# Altium PCB SUPI_MediumR2.PcbDoc
Units mil, origin at the board's own origin, x right, y up, seen from the top; angles counter-clockwise.
Board outline 2415 x 840 mil, 2 copper layers (Top Layer, Bottom Layer), stack 61.8 mil thick; 54 components, 26 nets, 179 pads, 34 vias.
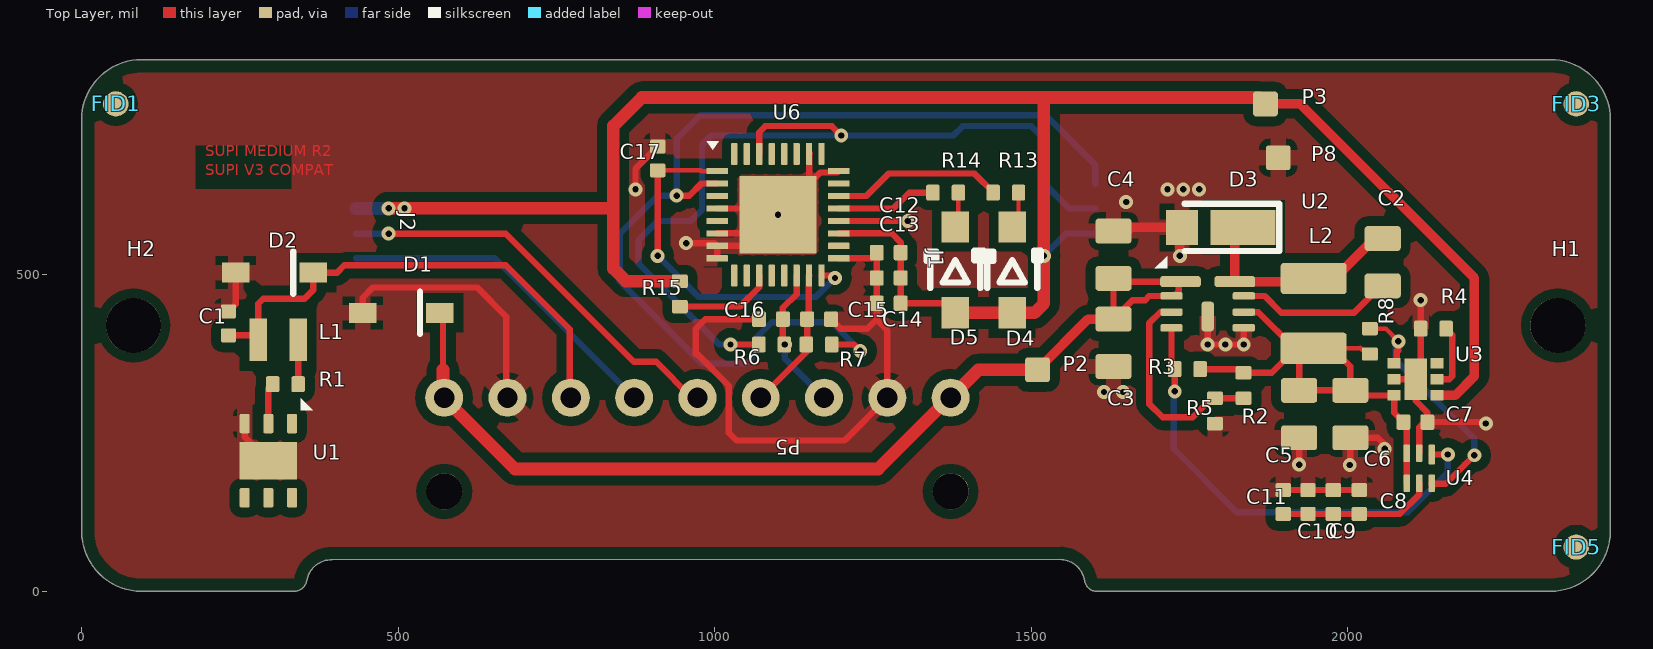
[diagram p0: Top Layer view]
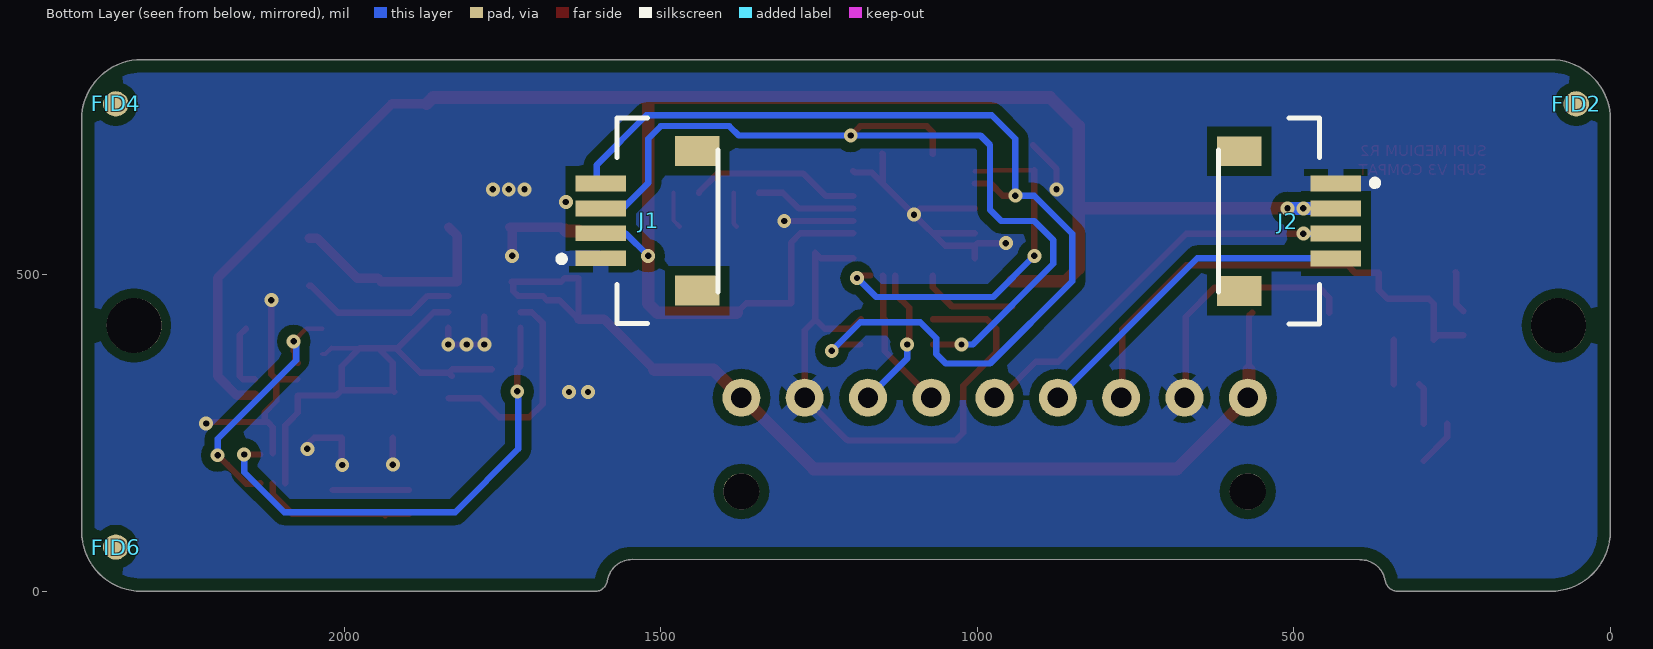
[diagram p1: Bottom Layer view, seen from below]

## Layer stack, top to bottom
Top Solder: solder mask 0.4, Solder Resist, Dk 3.5
Top Layer: signal copper 1.4
Dielectric1: dielectric 59, 370HR FR-4, Dk 4.8
Bottom Layer: signal copper 1.4
Bottom Solder: solder mask 0.4, Solder Resist, Dk 3.5

## Board outline
94.81,0 335.84,0 ccw(c335.84,20) 355.56,16.67 cw(c395,10) 360.36,30 cw(c395,10) 395,50 1545,50.36 cw(c1545,10.36) 1579.64,30.36 1579.64,30 cw(c1545,10) 1584.44,16.67 ccw(c1604.16,20) 1603.98,0 2320,0 ccw(c2320,95) 2415,95 2415,745 ccw(c2320,745) 2320,840 95,840 ccw(c95,745) 0,745 0,95 ccw(c95,95)

## Design rules (kind name [scope] priority, off if disabled: settings)
BoardOutlineClearance [All] p1: gap=20 ignorepadtopadclearanceinfootprint=FALSE
Clearance "Clearence 0.635_PadClass" [InPadClass('Pad Class Clearance 0.635')] p1: gap=25 ignorepadtopadclearanceinfootprint=FALSE
Clearance "Clearence 0.381_Polygon" [InNamedPolygon('F.Cu-') OR InNamedPolygon('B.Cu-')] p2: gap=15 ignorepadtopadclearanceinfootprint=FALSE
Clearance "Clearence 0.254_PadClass" [InPadClass('Pad Class Clearance 0.254')] p3: gap=10 ignorepadtopadclearanceinfootprint=FALSE
MinimumSolderMaskSliver [All] p1: minsoldermaskwidth=4
PolygonConnect Polygon_B.Cu-_ConnectDirect [IsNamedPolygon('B.Cu-') vs IsVia] p1: connectstyle=Direct reliefconductorwidth=10 reliefentries=4 polygonreliefangle="90 Angle" airgapwidth=10
PolygonConnect Polygon_B.Cu-_ConnectRelief45 [IsNamedPolygon('B.Cu-') vs (IsThruPin or IsSMTPin) and (PadShape_AllLayers = 'Round')] p2: connectstyle=Relief reliefconductorwidth=25 reliefentries=4 polygonreliefangle="45 Angle" airgapwidth=10
PolygonConnect Polygon_B.Cu-_ConnectRelief90 [IsNamedPolygon('B.Cu-') vs (IsThruPin or IsSMTPin) and (PadShape_AllLayers <> 'Round')] p3: connectstyle=Relief reliefconductorwidth=25 reliefentries=4 polygonreliefangle="90 Angle" airgapwidth=10
PolygonConnect Polygon_F.Cu-_ConnectDirect [IsNamedPolygon('F.Cu-') vs IsVia] p4: connectstyle=Direct reliefconductorwidth=10 reliefentries=4 polygonreliefangle="90 Angle" airgapwidth=10
PolygonConnect Polygon_F.Cu-_ConnectRelief45 [IsNamedPolygon('F.Cu-') vs (IsThruPin or IsSMTPin) and (PadShape_AllLayers = 'Round')] p5: connectstyle=Relief reliefconductorwidth=25 reliefentries=4 polygonreliefangle="45 Angle" airgapwidth=10
PolygonConnect Polygon_F.Cu-_ConnectRelief90 [IsNamedPolygon('F.Cu-') vs (IsThruPin or IsSMTPin) and (PadShape_AllLayers <> 'Round')] p6: connectstyle=Relief reliefconductorwidth=25 reliefentries=4 polygonreliefangle="90 Angle" airgapwidth=10
RoutingVias [All] p1: holewidth=28 width=50 viastyle="Through Hole" minholewidth=28 minwidth=50 maxholewidth=28 maxwidth=50
SilkToSilkClearance [All] p1: silktosilkclearance=4
SilkToSolderMaskClearance [IsPad] p1: minsilkscreentomaskgap=4 clearancetoexposedcopper=TRUE
SolderMaskExpansion [All] p1: expansion=4 istentingtop=FALSE
SupplyNets "Schematic Supply Nets" [InNet('GND')] p1: voltage=0.000
Width [All] p1: maxlimit=393.7 minlimit=7 preferedwidth=10 minimp=50.000000 maximp=50.000000 favimp=50.000000
27 further rules are at their usual default settings.

## Classes and differential pairs
component class "USB Interface": C12 C13 C14 C15 C16 C17 D4 D5 R13 R14 R15 U6
component class SUPI_MediumR2: D1 FID1 FID2 FID3 FID4 FID5 FID6 H1 H2 J1 J2 P2 P3 P5 P8 R6 R7
component class "Power Supplies": C2 C3 C4 C5 C6 C7 C8 C9 C10 C11 D3 L2 R2 R3 R4 R5 R8 U2 U3 U4
component class "Payload Detect": C1 D2 L1 R1 U1
pad class "Pad Class Clearance 0.635": P5-Un1 P5-Un2
pad class "Pad Class Clearance 0.254": FID1-Un1 FID2-Un1 FID3-Un1 FID4-Un1 FID5-Un1 FID6-Un1

## Components (designator, comment, footprint, x,y, rotation, side; value= is the part's Value field where it differs from the comment)
C1 "4700pF 50V" C_0402_1005Metric 232.05,423.37 r90 top
C2 "330n" C_0805_2012Metric 2055.29,520 r90 top
C3 "10u" C_0805_2012Metric 1630,392.6 r270 top
C4 "10u" C_0805_2012Metric 1630,531.8 r90 top
C5 "22u" C_0805_2012Metric 1923.29,280.1 r270 top
C6 "22u" C_0805_2012Metric 2004.29,280.1 r270 top
C7 "100n" C_0402_1005Metric 2106.87,267.45 r0 top
C8 "100n" C_0402_1005Metric 2018.29,141.2 r90 top
C9 "100n" C_0402_1005Metric 1977.29,141 r90 top
C10 "100n" C_0402_1005Metric 1937.29,141.1 r90 top
C11 "100n" C_0402_1005Metric 1898.29,141.2 r90 top
C12 "100n" C_0402_1005Metric 1275,535 r180 top
C13 "100n" C_0402_1005Metric 1275,495 r180 top
C14 "4u7" C_0402_1005Metric 1275,455 r180 top
C15 "47p" C_0402_1005Metric 1165,430 r0 top
C16 "47p" C_0402_1005Metric 1088.9,430 r180 top
C17 "100n" C_0402_1005Metric 910,683.9 r90 top
D1 "26VWM" SOD-123FL 505,440 r180 top
D2 "3.3VWM" SOD-123FL 304.79,503.5 r180 top
D3 "100v" SOD-123HE 1799.35,575 r180 top
D4 "RED LED" D_LED_0805_Kingbright 1470,507.91 r270 top
D5 "RED LED" D_LED_0805_Kingbright 1380,507.91 r270 top
FID1 "Fiducial" Fiducial_Cu0.040_Mask0.060#1 54,770 r0 top
FID2 "Fiducial" Fiducial_Cu0.040_Mask0.060#2 54,770 r180 top
FID3 "Fiducial" Fiducial_Cu0.040_Mask0.060#1 2361,770 r0 top
FID4 "Fiducial" Fiducial_Cu0.040_Mask0.060#2 2361,770 r180 top
FID5 "Fiducial" Fiducial_Cu0.040_Mask0.060#1 2361,70 r0 top
FID6 "Fiducial" Fiducial_Cu0.040_Mask0.060#2 2361,70 r180 top
H1 "MountingHole" MountingHole_2.2mm_M2_DIN965 2332,420 r0 top
H2 "MountingHole" MountingHole_2.2mm_M2_DIN965 82,420 r0 top
J1 "SM04B-SRSS-TB" SM04B-SRSS-TB 1518.72,585.32 r90 bottom
J2 "SM04B-SRSS-TB" SM04B-SRSS-TB 510,585 r270 bottom
L1 "27 OHM @2MHZ" IND_BOURNS_0806 310.55,397.26 r0 top
L2 "2u2" L_1210_3225Metric 1946.29,439.12 r270 top
P2 "*" TP_SMD_1MM 1510,350 r0 top
P3 "*" TP_SMD_1MM 1870,770 r270 top
P5 "829-22-009-20-001101" 829-22-009-20-001101 972.83,305.91 r0 top
P8 "*" TP_SMD_1MM 1890.29,685 r0 top
R1 "100 1% 0.1W" R_0402_1005Metric 321.97,327.26 r0 top
R2 "52k3" R_0402_1005Metric 1835.29,325.08 r270 top
R3 "113k" R_0402_1005Metric 1746.86,350.98 r0 top
R4 "10k" R_0402_1005Metric 2135.29,415 r0 top
R5 "10k" R_0402_1005Metric 1790.29,285.08 r90 top
R6 "0R" R_0402_1005Metric 1090,390 r180 top
R7 "0R" R_0402_1005Metric 1164.92,390 r0 top
R8 "10k" R_0402_1005Metric 2035,395 r270 top
R13 "499R" R_0402_1005Metric 1459.92,629.84 r180 top
R14 "499R" R_0402_1005Metric 1364.92,629.84 r180 top
R15 "10k" R_0402_1005Metric 945,469.92 r90 top
U1 "DS2431Q+" Maxim_TDFN-6-1EP_3x3mm_P0.95mm_EP1.5x2.3mm 295,206.44 r270 top
U2 "MCP16361" Microchip_8-VDFN_3x3x0p9 1778.78,453.88 r0 top
U3 "NCP380" WDFN-6_MicroFET_2x2 2107.35,335.1 r180 top
U4 "TPS3890" WSON-6_0.8mm_TI_DSE0006A 2112.98,194.45 r270 top
U6 "FT232RNQ" QFN-32-1EP_5x5mm_P0.5mm_EP3.1x3.1mm 1100,595 r0 top

## Footprints (in the part's own frame and the unit in brackets; to place one, negate y for a bottom-side part, rotate by r counter-clockwise, add the part's x,y. Pads: shape width x height; smd on the part's side, far side on the other; paste and mask are expansions set on the pad)
829-22-009-20-001101 [mil]
  round 60 hole 32: 1(-400,0) 2(-300,0) 3(-200,0) 4(-100,0) 5(0,0) 6(100,0) 7(200,0) 8(300,0) 9(400,0)
  round 57 hole 57 unplated: 10(-400,-148) 11(400,-148)
  body extent -450,-414 450,14, height 100
C_0402_1005Metric [mm]
  rrect25% 0.56x0.62 smd: 1(-0.48,0) 2(0.48,0)
C_0805_2012Metric [mm]
  rrect25% 1x1.45 smd: 1(-0.95,0) 2(0.95,0)
D_LED_0805_Kingbright [mm]
  rect 1.25x1.1 smd: 1(-1.725,0) 2(1.725,0)
  silkscreen extent -0.76,-1.15 0.73,1.14
Fiducial_Cu0.040_Mask0.060#1 [mil]
  round 40 smd paste-40 mask-40: Un1(0,0)
Fiducial_Cu0.040_Mask0.060#2 [mil]
  round 40 smd far side paste-40 mask-40: Un1(0,0)
IND_BOURNS_0806 [mil]
  rect 28x67 smd: 1(-31.5,0) 2(31.5,0)
L_1210_3225Metric [mm]
  rrect20% 1.25x2.65 smd: 1(-1.4,0) 2(1.4,0)
Maxim_TDFN-6-1EP_3x3mm_P0.95mm_EP1.5x2.3mm [mm]
  rrect25% 0.775x0.4 smd: 1(-1.488,0.95) 2(-1.488,0) 3(-1.488,-0.95) 4(1.488,-0.95) 5(1.488,0) 6(1.488,0.95)
  rect 1.5x2.3 smd paste-2539.97: 7(0,0)
  rrect25% 0.6x0.93 on Top Paste paste-0.93 mask-0.93: Un1(-0.375,0.575) Un2(-0.375,-0.575) Un3(0.375,0.575) Un4(0.375,-0.575)
  silkscreen extent -2.51,1.31 -2.03,1.79
Microchip_8-VDFN_3x3x0p9 [mm]
  rrect50% 1.63x0.45 smd mask+0.025: 1(-1.09,0.9) 8(1.09,0.9)
  rrect50% 0.9x0.3 smd mask+0.025: 2(-1.45,0.325) 7(1.45,0.325)
  rrect50% 0.9x0.3 smd mask+0.051: 3(-1.45,-0.325) 4(-1.45,-0.955) 5(1.45,-0.955) 6(1.45,-0.325)
  rrect50% 0.5x1.2 smd mask+0.051: 9(0,-0.5)
  silkscreen extent -2.12,1.43 -1.62,1.93
MountingHole_2.2mm_M2_DIN965 [mm]
  round 2.2 hole 2.2 paste-2539.97 mask-2.2: Un1(0,0)
QFN-32-1EP_5x5mm_P0.5mm_EP3.1x3.1mm [mm]
  rrect25% 0.875x0.25 smd mask+0.025: 1(-2.438,1.75) 8(-2.438,-1.75) 17(2.438,-1.75) 24(2.438,1.75)
  rrect25% 0.875x0.25 smd mask+0.051: 2(-2.438,1.25) 3(-2.438,0.75) 4(-2.438,0.25) 5(-2.438,-0.25) 6(-2.438,-0.75) 7(-2.438,-1.25) 18(2.438,-1.25) 19(2.438,-0.75) 20(2.438,-0.25) 21(2.438,0.25) 22(2.438,0.75) 23(2.438,1.25)
  rrect25% 0.25x0.875 smd mask+0.025: 9(-1.75,-2.438) 16(1.75,-2.438) 25(1.75,2.438) 32(-1.75,2.438)
  rrect25% 0.25x0.875 smd mask+0.051: 10(-1.25,-2.438) 11(-0.75,-2.438) 12(-0.25,-2.438) 13(0.25,-2.438) 14(0.75,-2.438) 15(1.25,-2.438) 26(1.25,2.438) 27(0.75,2.438) 28(0.25,2.438) 29(-0.25,2.438) 30(-0.75,2.438) 31(-1.25,2.438)
  rect 3.1x3.1 smd paste-2539.97 mask+0.051: 33(0,0)
  rrect25% 0.83x0.83 on Top Paste paste-0.83 mask-0.83: Un1(-1.03,1.03) Un2(-1.03,0) Un3(-1.03,-1.03) Un4(0,1.03) Un5(0,0) Un6(0,-1.03) Un7(1.03,1.03) Un8(1.03,0) Un9(1.03,-1.03)
  silkscreen extent -2.85,2.61 -2.37,2.94
R_0402_1005Metric [mm]
  rrect25% 0.54x0.64 smd: 1(-0.51,0) 2(0.51,0)
SM04B-SRSS-TB [mm]
  rect 0.635x2.032 smd paste+0: 1(-1.5,1.937) 2(-0.5,1.937) 3(0.5,1.937) 4(1.5,1.937)
  rect 1.2x1.8 smd paste+0: 5(-2.8,-1.937) 6(2.8,-1.937)
  silkscreen extent -4.13,-2.77 4.13,3.63, body extent -2.95,-2.29 3.05,2.66, height 2.96
SOD-123FL [mm]
  rect 1.1x0.8 smd: 1(-1.55,0) 2(1.55,0)
  silkscreen extent -0.75,-0.85 -0.75,0.85
SOD-123HE [mm]
  rect 2.6x1.4 smd: 1(-0.9,0)
  rect 1.3x1.4 smd: 2(1.55,0)
  silkscreen extent -2.35,-0.95 1.45,0.95
TP_SMD_1MM [mm]
  rrect25% 1x1 smd: 1(0,0)
WDFN-6_MicroFET_2x2 [mm]
  rect 0.52x0.42 smd mask+0.051: 1(-0.865,0.65) 2(-0.865,0) 3(-0.865,-0.65) 4(0.865,-0.65) 5(0.865,0) 6(0.865,0.65)
  rect 0.9x1.68 smd mask+0: 7(0,0)
WSON-6_0.8mm_TI_DSE0006A [mm]
  rrect25% 0.8x0.25 smd mask+0.051: 1(-0.55,0.5)
  rrect25% 0.7x0.25 smd mask+0.051: 2(-0.6,0) 3(-0.6,-0.5) 4(0.6,-0.5) 5(0.6,0) 6(0.6,0.5)

## Part data
C1: library part CAP-00371-1, "CAP 0402 4700PF 50V 10% X7R", MANUFACTURER="Murata Electronics", MfrPN=GCM155R71H472KA37J, MPN=GCM155R71H472KA37J
C2: library part CAP-00399-2, "CAP 0805 0.33uF 50V 10% X7R CER", Mfr=TDK, MfrPN=CGA4J2X7R1H334K125AA, DigikeyPN=445-5684-1-ND
C3 C4: library part CAP-00370-1, "CAP 0805 10UF 50V 10% X5R", Mfr=Samsung, MfrPN=CL21A106KBYQNNE, DigikeyPN=1276-CL21A106KBYQNNECT-ND
C5 C6: library part CAP-00013-15, "CAP 0805 22UF 16V 20% X5R", Mfr="Taiyo Yuden", MfrPN=EMK212BBJ226MG-T, DigikeyPN=587-3239-1-ND
C7 C8 C9 C10 C11 C12 C13 C17: library part CAP-00172-4, "Multilayer Ceramic Capacitor, 0.1 uF, 25 V, ± 10%, X7R, 0402 [1005 Metric]", Mfr=Samsung, MfrPN=CL05A104KA5NNNC, DigikeyPN=1276-1043-1-ND
C14: library part CAP-00128-6, "Cap Ceramic 4.7uF 6.3V JB 10% SMD 0402 85°C Punched Paper T/R", Mfr=Samsung, MfrPN=CL05A475KQ5NRNC, Cost=0.08, DigikeyPN=1276-1481-1-ND
C15 C16: library part CAP-00400-2, "CAP 0402 47pF 50V 5% C0G/NP0", Mfr=Samsung, MfrPN=CL05C470JB2NNNC, Cost=0.1, DigikeyPN=490-5942-1-ND
D1: library part CMP-00657-2, "SMF Series 200 W 26 V Uni-Directional Surface Mount TVS Diode - SOD-123F", MANUFACTURER=Littelfuse, Mfr=Eaton, MfrPN=SMF26A, DigikeyPN=283-SMF26ACT-ND
D2: library part CMP-00658-2, "ESD protection diodes / TVS diodes; LITTELFUSE; SMF3.3; 6.8 V; 30 A; 3.3 V; 3.4 V - 4.3 V", MANUFACTURER=Littelfuse, Mfr="Panjit International", MfrPN=P4FL3.3A_R1_00001, MPN=SMF3.3, DigikeyPN=3757-P4FL3.3A_R1_00001CT-ND
D3: library part CMP-00739-3, "DIODE SCHOTTKY 60V 3A SOD123HE", Mfr="Panjit International", MfrPN=SS3060HE_R1_00001, DigikeyPN=3757-SS3060HE_R1_00001CT-ND
D4 D5: library part CMP-00740-1, "Red 625nm LED Indication - Discrete 2.2V 0805", Mfr=Kingbright, MfrPN=APT2012SECK/J3-PRV, DigikeyPN=754-1791-2-ND, MouserPN=604-APT2012SECKJ3PRV
FID1 FID2 FID3 FID4 FID5 FID6: library part Fiducial_40mil_mask_60mil
J1 J2: library part CONN-00456-1, "Conn Shrouded Header (4 Sides) HDR 4 POS 1.25mm Solder RA Side Entry SMD T/R", Connector Type="Male Pin", Number of Contacts=4, Number of Positions=4, Number of Rows=1, Orientation="Right Angle", Pin Count=4, Pins=6, Pitch=990.6µm
L1: library part CMP-00660-4, "Ferrite Bead, Aec-Q200, 0806, 1A Rohs Compliant: Yes", MANUFACTURER="TDK Corporation", MfrPN=MDF2016BSS270C, DigikeyPN=455-MDF2016BSS270CTD25CT-ND, Mfr="TDK Corporation", MPN=MDF2016BSS270C
L2: library part CMP-00741-1, "FIXED IND 2.2UH 3A 72 MOHM SMD", Mfr="TE Connectivity", MfrPN=5-2176797-4, DigikeyPN=1712-5-2176797-4CT-ND
P2 P3 P8: library part Hand_Solder_Pad_100x80_mil
P5: library part CONN-00457-1, "Board Connector, 9 Contact(s), 1 Row(s), Male, Right Angle, Solder Terminal", Contact Gender=Male, Contact Plating=Gold, Leader Qty=5, Number of Contacts=9, Number of Rows=1, Pitch=2.54mm, System=Connector, Termination=Solder
R1: library part RES-00021-9, "Res 0402 100 Ohm 0.1W 1% Thick Film", MANUFACTURER="Panasonic Electronic Components", Mfr=Panasonic, MfrPN=ERJ-2RKF1000X, DigikeyPN=P100LCT-ND, MPN=ERJ-2RKF1000X
R2: library part RES-00761-2, "Res 0402 52.3K 1/10W 1% Thick Flim", Mfr=Panasonic, MfrPN=ERJ-2RKF5232X, DigikeyPN=P52.3KLCT-ND
R3: library part RES-00724-3, "Res 0402 113K 1/10W 1% Thick Flim", Mfr=Panasonic, MfrPN=ERJ-2RKF1133X, Cost=0.1, Desc="RES SMD 113k 1% 1/10W 0402", DigikeyPN=P113KLCT-ND
R4 R5 R8 R15: library part RES-00803-1, "RES 0402 10K 1/10W 1%", Mfr="KOA Speer", MfrPN=RK73H1ETTP1002F, DigikeyPN=2019-RK73H1ETTP1002FCT-ND
  R4 R5 R8: MouserPN=660-RK73H1ETTP1002F, OtherPN=2019-RK73H1ETTP1002FCT-ND
R6 R7: library part RES-00249-8, "Res 0402 0 Ohm 1/16W 5% Thick Film"
R13 R14: library part RES-00802-1, "RES 0402 499 OHM 1/10W 1%", Mfr=Panasonic, MfrPN=ERJ-2RKF4990X, DigikeyPN=P499LCT-ND, MouserPN=499R
U1: library part IC-00419-6, "IC EEPROM 1KBIT 1-WIRE 6TDFN", MANUFACTURER="Analog Devices Inc./Maxim Integrated", MfrPN=DS2431Q+T&R, DigikeyPN=DS2431Q+T&RCT-ND, Mfr="Analog Devices Inc./Maxim Integrated", MPN=DS2431Q+T&R
U2: library part IC-00466-4, "IC BUCK CONVERTER 48V 2MHZ", Mfr="Microchip Technology", MfrPN=MCP16361T-E/NMX, Cost=2.18, DigikeyPN=150-MCP16361T-E/NMXCT-ND
U3: library part IC-00468-3, "Power Distribution Switch, Current-Limiting (Fixed and Adjustable) Adjustable, Enable H", Mfr=onsemi, MfrPN=NCP380HMUAJAATBG, DigikeyPN=NCP380HMUAJAATBGOSCT-ND
U4: library part IC-00469-2, "Supervisor Open Drain or Open Collector 1 Channel 6-WSON (1.5x1.5)", Mfr="Texas Instruments", MfrPN=TPS389030DSER, Cost=1.68, Desc="Voltage supervisor timed reset", DigikeyPN=296-51976-1-ND
U6: library part IC-00470-3, "USB Bridge, USB to UART USB 2.0 UART Interface 32-QFN (5x5)", Mfr=FTDI, MfrPN=FT232RNQ-TRAY, DigikeyPN=768-FT232RNQ-TRAY-ND, MouserPN=895-FT232RNQ-TRAY

## Via types
v1: diameter 22/22 (per signal layer), hole 10, Top Layer to Bottom Layer, tented both sides, 34 vias

## Nets (pads, with @x,y where several pads share a name; then routed paths per layer and width w, separated by ;. In a path a pad name is that pad's centre, name@x,y a point inside that pad or via, vN(x,y) a via of type N, cw(c..) or ccw(c..) an arc to the next point about the centre after c; other vN are vias at no path point)
DETECT: C1.1 D2.1 L1.1 P5.3 | length 790.9
  Top Layer w10: C1.1 271.84,404.47 L1.1 279.05,454.26 287.05,462.26 352.05,462.26 365.81,476.03 D2.1 403.5,503.5 415,515 670,515 771,414 771,307.74 P5.3
GND: C1.2 C3.2 C4.2 C5.2 C6.2 C7.2 C8.2 C9.2 C10.2 C11.2 C12.2 C13.2 C14.2 C15.2 C16.2 C17.2 D1.2 D2.2 D3.2 J1.1 J2.1 P5.2 P5.8 P8.1 R4.1 R5.1 U1.3 U1.7 U2.5 U2.9 U3.5 U3.7 U4.2 U6.4 U6.6 U6.7 U6.8 U6.17 U6.20 U6.24 U6.26 U6.33 | length 3309
  Top Layer w10: C1.2 243.76,453.98 D2.2 D2.2@244.79,504.53 ; U1.3 257.6,243.84 U1.7 ; D1.2 443.98,463.98 460,480 625,480 671,434 P5.2@671,306 ; v1(875,635) 875,667.8 C17.2 C17.2@912.2,705 ; v1(955,550) 999.82,550 U6.7 ; U6.8 U6.7 ; U6.6 1070.47,565.47 v1(1100,595) ; U6.4 1090.16,604.84 v1(1100,595) ; C16.2 985,430 970,415 970,375 972.44,375 1022.44,325 1022.44,250.79 1035.04,238.19 1204.72,238.19 1206.3,239.76 1206.69,239.76 P5.8 1272.83,412.6 1256.1,429.33 1256.1,430 ; U6.26@1150,691.75 U6.26 1149.21,644.21 v1(1100,595) ; C15.2 1198.9,415 1241.1,415 1256.1,430 ; U6.17 1247.2,526.1 C12.2 C14.2 1256.1,430 ; U6.20 1240.16,585.16 1240.32,585 v1(1305,585) ; U6.24 1193.77,661.7 1166.7,661.7 v1(1100,595) ; U2.9 v1(1778.78,390) v1(1835.78,390) 1835.87,390.09 U2.5 ; C11.2 C8.2 ; v1(1923.29,200.1) C5.2 ; v1(2003.29,199.5) 2004.29,200.5 C6.2 2047.49,242.7 2058.29,231.89 v1(2058.29,225.1) ; U3.5@2074.24,335.1 U3.7@2108.29,335.1 ; U4.2 2112.98,259.24 2121.18,267.45 C7.2 ; v1(2115.29,460) 2115.21,459.92 R4.1 2115.21,342.96 U3.7 2107.35,301.04 2125.77,282.62 C7.2 ; v1(2218.29,265.1) 2215.94,267.45 C7.2 ; U6.7 1050.79,545.79 v1(1100,595)
  Top Layer w15: C4.2 1652.28,569.2 1658.09,575 D3.2 1734.78,571.46 v1(1734.78,530)
  Top Layer w20: C4.2 1649.28,569.2 C4.2@1650.78,570.7
  Bottom Layer w10: v1(955,550) v1@957.44,552.44
  other v1: 1615,315 1645,315 1806.78,390 1650,615 1715.29,635 1740.29,635 1765.29,635
GPIO0: J2.4 P5.4 | length 530.4
  Bottom Layer w10: J2.4@433.54,525.94 652.8,525.94 P5.4
GPIO1: J2.3 P5.5 | length 646.7
  Top Layer w10: v1(485,565) 670,565 872.5,362.5 907.5,362.5 964.09,305.91 P5.5
  Bottom Layer w10: J2.3@433.54,565.32 433.86,565 v1(485,565)
NetC2_1: C2.1 U2.7 | length 248.1
  Top Layer w10: U2.7 1868.61,466.68 1895.29,440 2010,440 2052.6,482.6 C2.1
NetC2_2: C2.2 D3.1 L2.1 U2.8 | length 352.9
  Top Layer w15: D3.1 1821.69,561.91 U2.8 1941.37,489.32 L2.1 1979.24,494.24 2042.4,557.4 C2.2
NetC5_1: C5.1 C6.1 C7.1 L2.2 R2.1 R3.2 R8.2 U2.6 U3.6 U4.3 U4.4 | length 919.9
  Top Layer w7: L2.2 2019,384 2020,385 2030.08,374.92 R8.2
  Top Layer w10: R3.2 1829.47,350.98 R2.1 ; R2.1@1830.21,340.08 R2.1 ; U2.6 1858.91,441.09 1916,384 L2.2 ; C5.1@1920.97,315.18 C5.1 ; U4.4 U4.3 2093.29,262.13 C7.1 2073.29,282.13 U3.6 2012.28,309.51 C6.1 ; R2.1 1880.16,345.16 1919,384 L2.2 ; C5.1 1923.29,361 L2.2 ; C5.1 C6.1 ; L2.2 1976,384 2004.29,355.71 C6.1
NetC8_1: C8.1 C9.1 C10.1 C11.1 U4.5 | length 248.1
  Top Layer w10: C11.1 C8.1 2082.3,122.3 2112.98,152.98 U4.5 ; C10.1@1935.29,120.2 C10.1
NetC12_1: C12.1 C13.1 C14.1 D4.2 D5.2 J1.2 J2.2 P3.1 R15.2 U3.1 U6.19 | length 3429.4
  Top Layer w10: U6.19 1279.53,565.47 1293.9,551.1 C12.1 C14.1 1365,455 D5.2
  Top Layer w15: P3.1 1925,770 2200.29,494.71 2200.29,340 2169.8,309.51 U3.1
  Top Layer w20: v1@500,605 v1(510,605) v1(485,605) 840,605 ; R15.2 860,490 840,510 840,605 ; D5.2 D4.2 1505,440 1520,455 v1(1520,530) 1520,770.04 ; P3.1 1860,780 885,780 840,735 840,605
  Bottom Layer w10: v1(1520,530) 1555.32,565.32 J1.2@1601.46,565.32
  Bottom Layer w20: v1(485,605) 433.86,605 433.54,604.68 509.68,604.68 v1(510,605)
NetC17_1: C17.1 U6.1 U6.16 | length 571.6
  Top Layer w7: C17.1 977.8,665 978.9,663.9 U6.1
  Top Layer w10: v1(910,530) C17.1 ; U6.16 1185.96,499.04 v1(1190,495)
  Bottom Layer w10: v1(910,530) 975,465 1160,465 v1(1190,495)
NetD4_1: D4.1 R13.1 | length 58.2
  Top Layer w7: D4.1 1480,585.83 R13.1
NetD5_1: D5.1 R14.1 | length 56.1
  Top Layer w7: D5.1 1385,580.83 R14.1
NetJ1_3: J1.3 R6.2 U6.30 | length 1406.1
  Top Layer w10: v1(1025,390) R6.2 ; U6.30@1070,691.44 U6.30 1070.47,725.47 1080,735 1185,735 v1(1200,720)
  Bottom Layer w10: v1(1025,390) 1007.52,390 879.96,517.56 879.96,554.96 909.96,584.96 962.44,584.96 980,602.52 980,705 995,720 v1(1200,720) 1376.82,720 1391.82,735 1500,735 1520,715 1520,645 1560.32,604.68 J1.3@1601.46,604.68
NetJ1_4: J1.4 R7.2 U6.2 | length 1633.9
  Top Layer w10: v1(940,625) 960,625 979.21,644.21 U6.2 ; R7.2 1220,390 v1(1230,380)
  Bottom Layer w10: v1(1230,380) 1185,425 1090,425 1065,400 1065,375 1050,360 980,360 850,490 850,565 910,625 v1(940,625) 940,715 977.06,752.06 1522.94,752.06 1601.46,673.54 J1.4@1601.46,644.06
NetL1_2: L1.2 R1.2 | length 70
  Top Layer w10: R1.2 L1.2
NetR1_1: R1.1 U1.2 | length 65.1
  Top Layer w10: U1.2 295,320.37 R1.1
NetR2_2: R2.2 R5.2 U2.3 | length 339.7
  Top Layer w10: U2.3 1703.98,441.09 1686.78,423.89 1686.78,295.98 1707.76,275 1755.29,275 1785.45,305.16 R5.2 1790.45,305 R2.2
NetR3_1: R3.1 U2.4 U4.1 | length 748.5
  Top Layer w10: U2.4 1721.69,356.07 R3.1 v1(1726.78,315.98) ; U4.1 v1(2158.27,216.1)
  Bottom Layer w10: v1(1726.78,315.98) 1725,314.2 1725,225 1825,125 2095,125 2158.27,188.27 v1(2158.27,216.1)
NetR4_2: R4.2 U3.2 | length 105
  Top Layer w10: U3.2 2160.39,335.1 2165.29,340 2165.29,405.08 R4.2
NetR8_1: R8.1 U3.4 U4.6 | length 411.3
  Top Layer w7: R8.1 2059.92,415.08 v1(2080,395)
  Top Layer w10: U3.4 2077.63,365.03 2077.63,380.17 2080,380.17 v1(2080,395) ; U4.6 2133.49,170 2154.65,170 2184.65,200 2185,200 v1(2200,215)
  Bottom Layer w10: v1(2080,395) 2075.81,390.81 2075.81,365.1 2200,240.91 v1(2200,215)
NetR13_2: R13.2 U6.22 | length 271.2
  Top Layer w10: U6.22 1239.53,624.53 1275,660 1410,660 1439.84,630.16 R13.2
NetR14_2: R14.2 U6.21 | length 159.2
  Top Layer w10: U6.21 1282.36,604.84 1307.36,629.84 R14.2
NetR15_1: R15.1 U6.11 | length 156.7
  Top Layer w10: R15.1 945.16,450 1040,450 1070.47,480.47 U6.11
USB_D+: C16.1 P5.7 R6.1 U6.14 | length 228.7
  Top Layer w10: R6.1 1107.8,392.28 C16.1 1107.8,447.8 1129.53,469.53 U6.14
  Bottom Layer w10: v1(1111,390) 1111,367.74 P5.7
USB_D-: C15.1 P5.6 R7.1 U6.15 | length 226
  Top Layer w10: P5.6 1146.1,379.17 C15.1 ; C15.1@1148.66,427.66 1148.66,498.48 U6.15
VBATT: C3.1 C4.1 D1.1 P2.1 P5.1 P5.9 U2.1 U2.2 | length 1647.5
  Top Layer w10: D1.1 571,435.02 571,350 ; C3.1 C4.1 1652.28,494.39 1657.36,489.32 U2.1 1733,486.45 1733,474 1725.68,466.68 U2.2 1686.68,466.68 1680,460 1660,460 C3.1
  Top Layer w15: P2.1 1590,430 C3.1
  Top Layer w20: 571,350 571,307 684.69,193.31 1258.31,193.31 P5.9@1371,306 ; P5.9 1416.93,350 P2.1
pads on no net: FID1.Un1 FID2.Un1 FID3.Un1 FID4.Un1 FID5.Un1 FID6.Un1 H1.Un1 H2.Un1 J1.5 J1.6 J2.5 J2.6 P5.10 P5.11 U1.1 U1.4 U1.5 U1.6 U1.Un1 U1.Un2 U1.Un3 U1.Un4 U3.3 U6.3 U6.5 U6.9 U6.10 U6.12 U6.13 U6.18 U6.23 U6.25 U6.27 U6.28 U6.29 U6.31 U6.32 U6.Un1 U6.Un2 U6.Un3 U6.Un4 U6.Un5 U6.Un6 U6.Un7 U6.Un8 U6.Un9

## Polygon pours and split planes (outlines as drawn)
GND on Bottom Layer "B.Cu-" (solid, remove dead copper, pour order 1): 2415,1 0,0 0,840 2415,840
GND on Top Layer "F.Cu-" (solid, remove dead copper, pour order 0): 2415,1 0,0 0,840 2415,840

## Other copper
Top Layer:
  text "SUPI MEDIUM R2 / SUPI V3 COMPAT" at 195,651.26 h30

## Silkscreen, mask and mechanical layers (free items; w line width, h text height)
User.6:
  circle w10: c2332.5,420 r43.31
  circle w10: c82.5,420 r43.31
  lines w10: 355.56,16.67 cw(c395,10) 360.36,30 ; 360.36,30 cw(c395,10) 395,50 1545,50 cw(c1545,10) 1579.64,30 ; 360.36,30 277.35,30 cw(c277.5,90) 217.5,90 217.5,750 cw(c277.5,750) 277.5,810 2137.5,810 cw(c2137.5,750) 2197.5,750 2197.5,90 cw(c2137.5,90) 2137.5,30 1579.64,30 ; 1579.64,30 cw(c1545,10) 1584.44,16.67 1579.64,30 ; 1338.98,317.72 1403.15,317.72 1403.15,381.89 1338.98,381.89 1338.98,317.72
F.Fab:
  lines w10: 446,404 567,404 567,474 446,474 446,404
  text "K" at 1856.43,564.1 h39.37
  text "K" at 582,404.1 h39.37
  text "F.Cu - 1 OZ NOMINAL" at 4641,185.81 h39.37
  text "0.062{dblquote} +/- 10%" at 6377,77.68 h39.37
  text "B.Cu - 1 OZ NOMINAL" at 4633,-17.19 h39.37
  text "5. SOLDER MASK GREEN BOTH SIDES /  / 6. NO SILKSCREEN" at 4332.28,-2232.64 h39.37
Fabrication Notes:
  text "NOTES: UNLESS OTHERWISE SPECIFIED / 1: STANDARDS / 	1.1: THE PCB SHALL BE FABRICATED IN ACCORDANCE WITH THE CURRENT REVISION OF IPC-6012 CLASS 2. / 	1.2: INTERPRET DIMENSIONS AND TOLERANCES IN ACCORDANCE WITH THE CURRENT REVISION OF ASME Y14.5M. / 	1.3: TEST IN ACCORDANCE WITH THE CURRENT REVISION OF IPC-TM-650 2.4.22. / 	1.4: DO NOT SCALE TO DRAWING. / 2: MATERIAL / 	2.1: THE PCB DIELECTRIC MATERIAL SHALL BE 370HR. / 	2.2: THICKNESSES OF CONDUCTOR AND DIELECTRIC SHALL MATCH THE STACKUP DRAWING. / 3: FLATNESS / 	3.1: BOW AND TWIST OF ASSEMBLY SUB-PANEL OR SINGULATED PWB SHALL NOT EXCEED 0.75%. / 	3.2: TEST IN ACCORDANCE WITH CURRENT REVISION OF IPC-TM-650 2.4.22. / 4: ETCH GEOMETRY. / 	4.1: MEASURE WIDTH FROM THE BASE OF THE METALLIZATION. / 	4.2: FINISHED LINE WIDTH AND TERMINAL AREA SHALL NOT DEVIATE FROM THE GERBER PATTERN IMAGE BY MORE THAN 20%. / 5: SURFACE FINISH / 	5.1: FINAL FINISH SHALL BE IN ACCORDANCE WITH IPC-4552 AND SHALL BE ENIG. / 6: HOLES / 	6.1: SEE HOLE TABLE FOR DIMENSIONS (AFTER PLATING WHERE APPLICABLE). / 	6.2: PLATING IN HOLES SHALL BE CONTINUOUS ELECTROLYTIC COPPER IN ACCORDANCE WITH IPC-6012, CLASS 2. / 	6.3: SEE DRILL CHART FOR FINISHED HOLE SIZE AND PLATING. / 	6.4: ALL HOLES SHALL BE LOCATED WITHIN 3 MIL OF TRUE POSITION AS SUPPLIED IN CAD DATA. / 	6.5: THE TOLERANCE FOR ALL HOLES SHALL BE AS INDICATED IN THE HOLE TABLE. / 	6.6: HOLES IN THE HOLE TABLE MARKED AS {dblquote}CAPPED/FILLED{dblquote} SHALL BE FILLED WITH A NON-CONDUCTIVE MATERIAL AND PLATED OVER. / 7: SOLDERMASK / 	7.1: SOLDERMASK OVER BARE COPPER (SMOBC) ON PRIMARY AND SECONDARY SIDES USING SUPPLIED ARTWORK IN ACCORDANCE WITH CURRENT REVISION OF IPC-SM-840 TYPE B. / 	7.2: COLOR: GREEN. / 	7.3: LIQUID PHOTO-IMAGEABLE (LPI) 0.001 INCH TO 0.002 INCH THICKNESS, HALOGEN FREE. / 	7.4: NO BLEED-OUT ALLOWED OVER EXPOSED SMD PADS. / 8: SILKSCREEN / 	8.1: SILKSCREEN PRIMARY AND SECONDARY SIDE WITH NON-CONDUCTIVE, NON-NUTRIENT EPOXY INK. / 	8.2: COLOR: WHITE. / 	8.3: ANY UNSPECIFIED STROKE WIDTH SHALL BE 5 MIL. / 	8.4: CLIP SILKSCREEN AWAY FROM ANY EXPOSED METAL. / 9: FINISHING / 	9.1: REMOVE ALL BURRS AND BREAK SHARP EDGES. / 10: IMPEDANCE (ALL TOLERANCED +/- 10%) / 	10.1: SEE IMPEDANCE REFERENCE TABLES. / 	10.2: VENDOR MAY ADJUST DESIGN GEOMETRIES UP TO +/-20% TO ACHIEVE TARGET IMPEDANCE. ADJUSTMENTS BEYOND 20% OF LINE WIDTH, SPACING OR DIELECTRIC THICKNESS SHALL REQUIRE APPROVAL FROM DRAPER ENGINEERING. / 	10.3: VENDOR MAY SUBSTITUTE SPECIFIC CORES OR PREPREGS TO ACHIEVE IMPEDANCE TARGETS AS LONG AS THE DIELECTRIC REMAINS UNCHANGED. / 11: PANELIZED PWBS LAYOUT / 	11.1: IF THE PWB IS PANELIZED, THE VENDOR HAS THE FREEDOM TO MOVE INDIVIDUAL OR GROUPED PWBS TO ANY LOCATION ON THE PANEL TO EASE FABRICATION OR TEST. / 12: NET TIES AND SHORTS / 	12.1: CONSULT THE NET TIE SHORTS TABLE FOR NETS THAT ARE INTENTIONALLY SHORTED WITH NET TIES. / 13: NON-DESTRUCTIVE EVALUATION / 	13.1: ALL PWBS SHALL PASS 100% ELECTRICAL TEST USING SUPPLIED IPC-D-365 NETLIST IN ACCORDANCE WITH CURRENT REVISION OF IPC-9252, CLASS 2. / 	13.2: CERTIFICATE OF CONFORMANCE SHALL BE SUPPLIED WITH EACH SHIPMENT. / 	13.3: ALL BARE BOARDS THAT PASS ELECTRICAL TEST SHALL BE MARKED WITH WHITE EPOXY INK, IN ACCORDANCE WITH MIL-STD-130, WITH THE LETTERS 'ET'.  MARKING SHALL NOT INTERFERE WITH ANY TRACE OR MOUNTING PAD." at 3923,-2055.11 h50

## Dimensions
0,0 to 0,840 on Fabrication Notes
0,0 to 2415,0 on Fabrication Notes
2319,840 to 2319,0 on Dimensions
-1,-24 to 2414,-11 on Dimensions

## Text inside footprints (layer, text, board x,y; h text height)
D4: F.Fab "A" at 1496.81,436.26 h15.75 r90; F.Fab "K" at 1496.78,598.07 h15.75 r90
D5: F.Fab "A" at 1406.81,436.26 h15.75 r90; F.Fab "K" at 1406.78,598.07 h15.75 r90